# Altium PCB Controller.PcbDoc
Units mm, origin at the board's own origin, x right, y up, seen from the top; angles counter-clockwise.
Board outline 99.31 x 94.49 mm, 2 copper layers (Top Layer, Bottom Layer); 8 components, 17 nets, 92 pads, 45 vias.
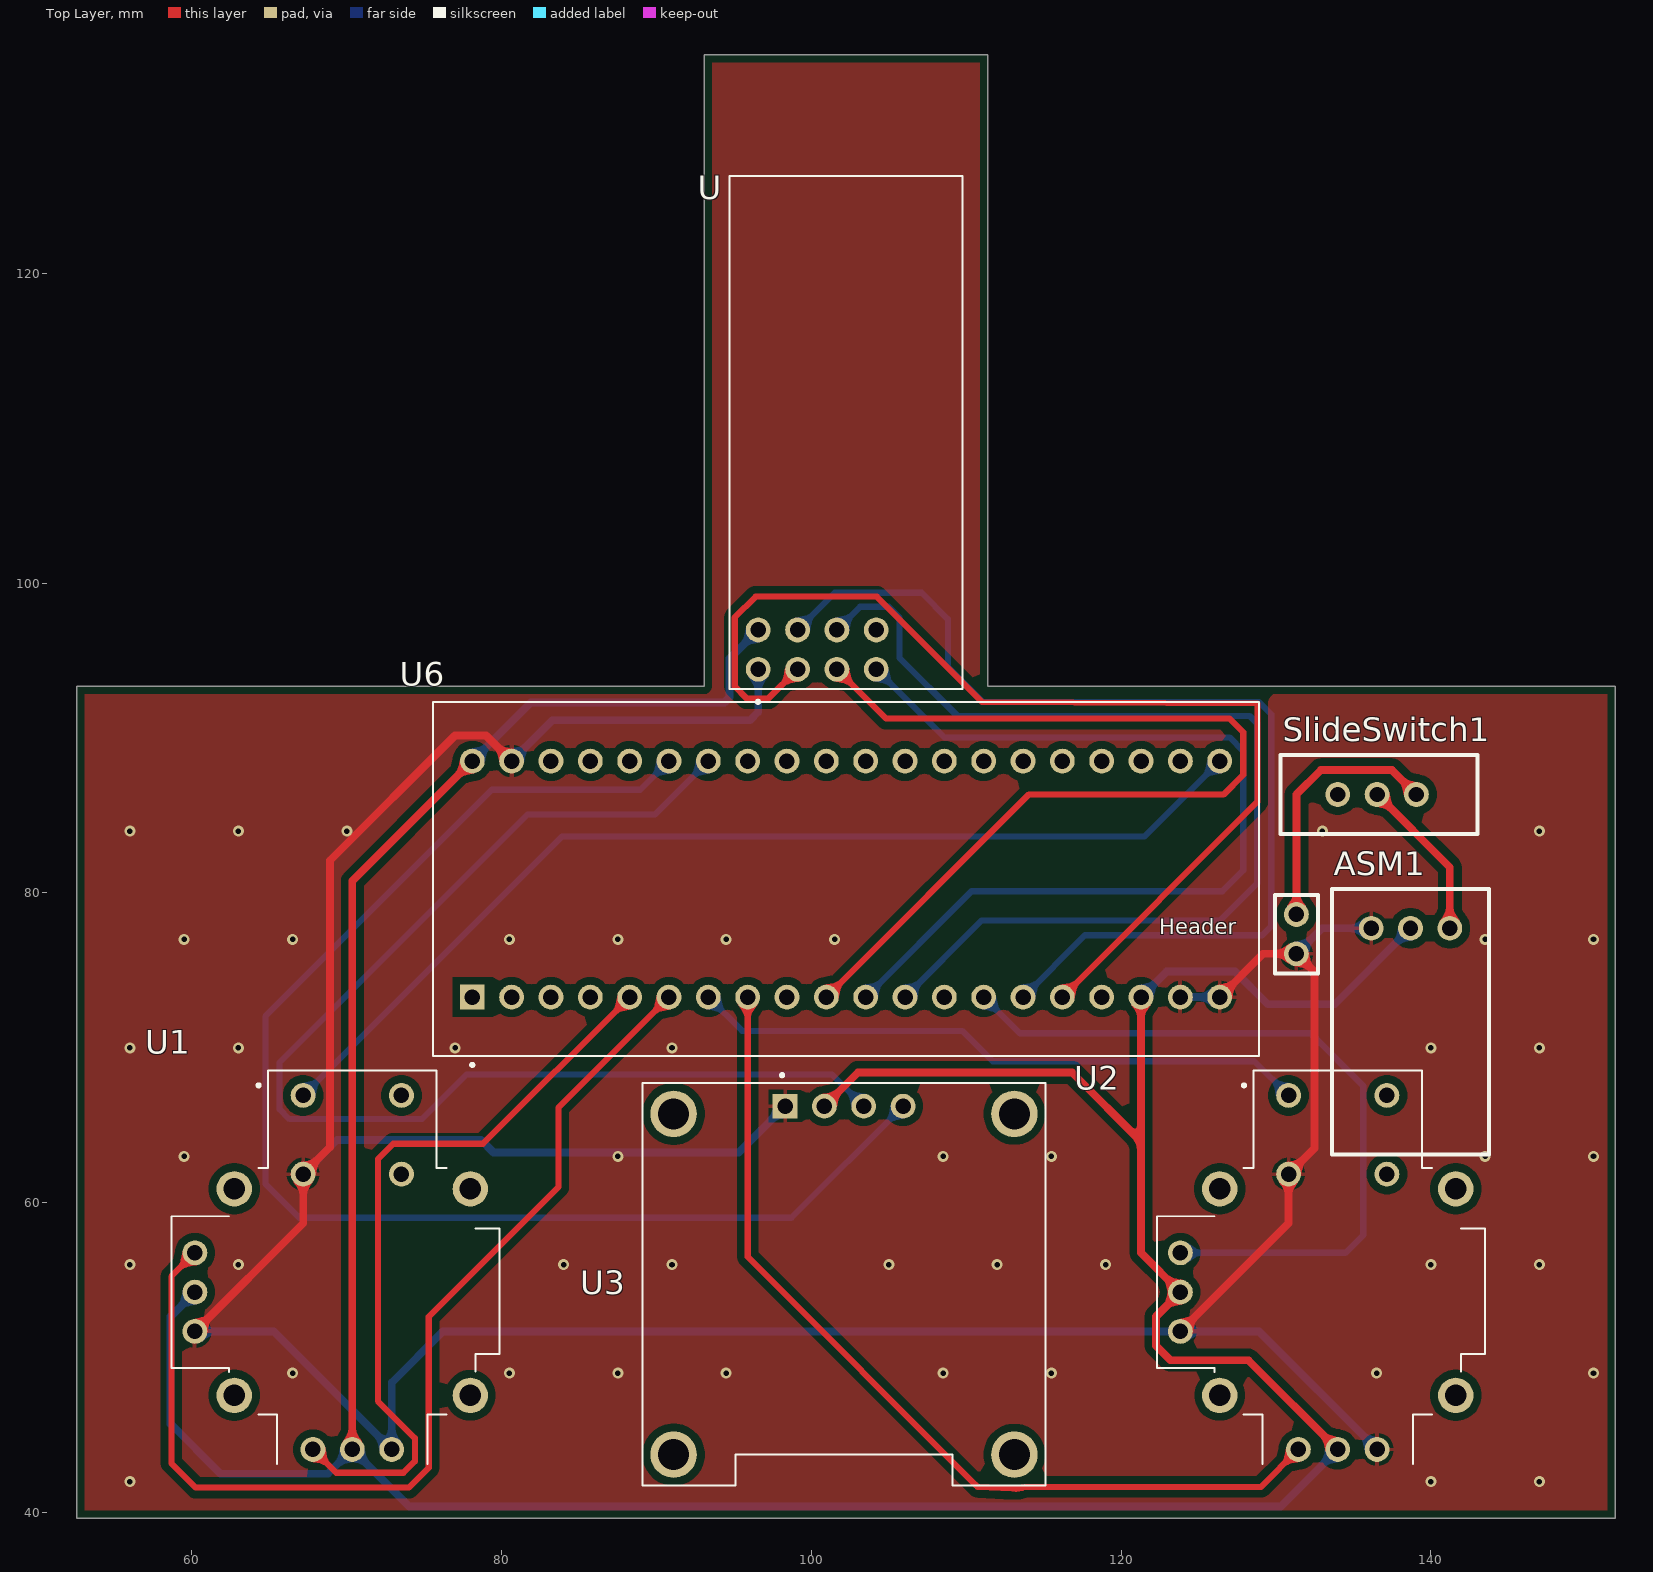
[diagram p0: Top Layer view]
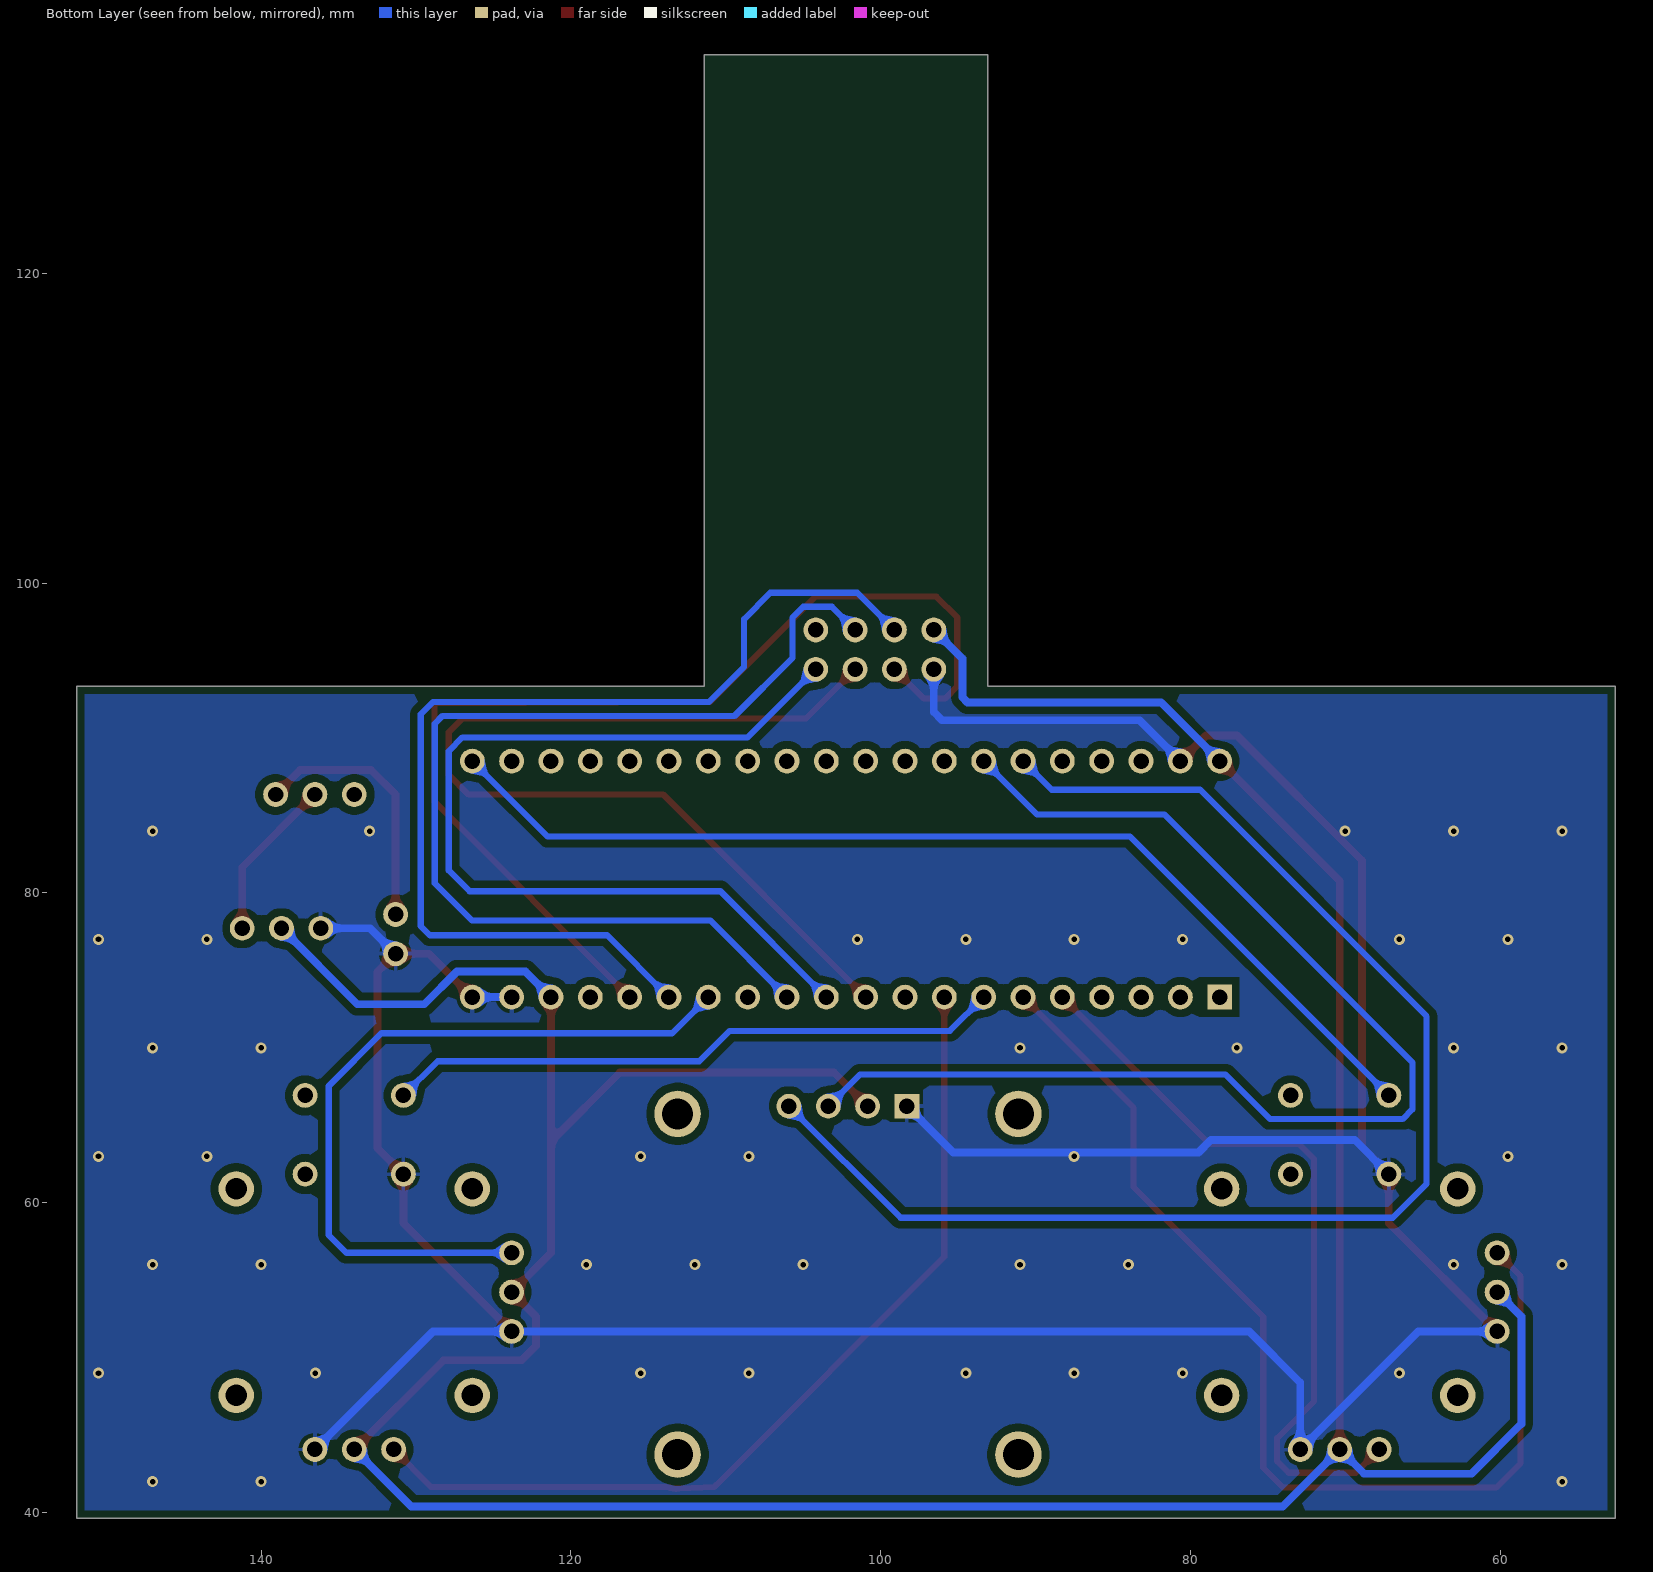
[diagram p1: Bottom Layer view, seen from below]

## Layer stack, top to bottom
Top Solder: solder mask 0.0102, Solder Resist, Dk 3.5
Top Layer: signal copper 0.0356
Dielectric 1: dielectric 0.32, FR-4, Dk 4.8
Bottom Layer: signal copper 0.0356
Bottom Solder: solder mask 0.0102, Solder Resist, Dk 3.5

## Board outline
93.091,93.345 93.091,134.112 111.379,134.112 111.379,93.345 151.892,93.345 151.892,39.624 52.578,39.624 52.578,93.345

## Design rules (kind name [scope] priority, off if disabled: settings)
BoardOutlineClearance [IsPolygon] p1: gap=0.5 ignorepadtopadclearanceinfootprint=FALSE
Clearance [All] p1: gap=0.5 ignorepadtopadclearanceinfootprint=FALSE
PolygonConnect [All] p1: connectstyle=Relief reliefconductorwidth=0.254 reliefentries=4 polygonreliefangle="90 Angle" airgapwidth=0.254
RoutingVias [All] p1: holewidth=0.711 width=1.27 viastyle="Through Hole" minholewidth=0.711 minwidth=1.27 maxholewidth=0.711 maxwidth=1.27
SolderMaskExpansion [All] p1: expansion=0.102 istentingtop=FALSE
SupplyNets "Schematic Supply Nets_2" [InNet('GND')] p1: voltage=0.000
SupplyNets "Schematic Supply Nets_1" [InNet('+3.3V')] p2: voltage=0.000
Width Width_Power [InNet('+3.3V') or  InNet('GND')  or  InNet('NetASM1_0') or  InNet('NetHeader_2')] p1: maxlimit=0.5 minlimit=0.5 preferedwidth=0.5
Width [All] p2: maxlimit=0.4 minlimit=0.4 preferedwidth=0.4
30 further rules are at their usual default settings.

## Components (designator, comment, footprint, x,y, rotation, side; value= is the part's Value field where it differs from the comment)
ASM1 "ASM1117-3.3" PCBComponent_1#1 138.684,77.724 r270 top
Header "Header" 1X2P 131.445,79.375 r180 top
SlideSwitch1 "SlideSwitch" PCBComponent_1#2 132.842,86.36 r270 top
U "NRF24L01P-MODULE-PCB" XCVR_NRF24L01P-MODULE-PCB 102.235,109.728 r90 top
U1 "COM-09032" XDCR_COM-09032 70.358,54.229 r0 top
U2 "COM-09032" XDCR_COM-09032 133.985,54.229 r0 top
U3 "DM-OLED096-636" MODULE_DM-OLED096-636 102.108,54.737 r0 top
U6 "STM32103C8T6" MODULE_ZC323000 102.235,80.899 r90 top

## Footprints (in the part's own frame and the unit in brackets; to place one, negate y for a bottom-side part, rotate by r counter-clockwise, add the part's x,y. Pads: shape width x height; smd on the part's side, far side on the other; paste and mask are expansions set on the pad)
1X2P [mm]
  round 1.6 hole 1: 1(0.127,3.302) 2(0.127,0.762)
  silkscreen extent -1.27,-0.51 1.52,4.57
MODULE_DM-OLED096-636 [mm]
  rect 1.6x1.6 hole 1: 1(-3.81,11.5)
  round 1.6 hole 1: 2(-1.27,11.5) 3(1.27,11.5) 4(3.81,11.5)
  round 3 hole 2: S1(-11,11) S2(11,11) S3(11,-11) S4(-11,-11)
  silkscreen extent -13,-13 13,13.6, body extent -13,-13 13,13, height 5.66
MODULE_ZC323000 [mm]
  rect 1.6x1.6 hole 1: 1(-7.62,24.13)
  round 1.6 hole 1: 2(-7.62,21.59) 3(-7.62,19.05) 4(-7.62,16.51) 5(-7.62,13.97) 6(-7.62,11.43) 7(-7.62,8.89) 8(-7.62,6.35) 9(-7.62,3.81) 10(-7.62,1.27) 11(-7.62,-1.27) 12(-7.62,-3.81) 13(-7.62,-6.35) 14(-7.62,-8.89) 15(-7.62,-11.43) 16(-7.62,-13.97) 17(-7.62,-16.51) 18(-7.62,-19.05) 19(-7.62,-21.59) 20(-7.62,-24.13) 21(7.62,-24.13) 22(7.62,-21.59) 23(7.62,-19.05) 24(7.62,-16.51) 25(7.62,-13.97) 26(7.62,-11.43) 27(7.62,-8.89) 28(7.62,-6.35) 29(7.62,-3.81) 30(7.62,-1.27) 31(7.62,1.27) 32(7.62,3.81) 33(7.62,6.35) 34(7.62,8.89) 35(7.62,11.43) 36(7.62,13.97) 37(7.62,16.51) 38(7.62,19.05) 39(7.62,21.59) 40(7.62,24.13)
  silkscreen extent -12.1,-26.67 11.43,26.67, body extent -10.39,-25.46 10.39,27.08, height 3.46
PCBComponent_1#1 [mm]
  round 1.6 hole 1: 0(0,2.54) 1(0,0) 2(0,-2.54)
  silkscreen extent -2.54,-5.08 14.6,5.08
PCBComponent_1#2 [mm]
  round 1.6 hole 1: 0(0,6.223) 1(0,3.683) 2(0,1.143)
  silkscreen extent -2.54,-2.54 2.54,10.16
XCVR_NRF24L01P-MODULE-PCB [mm]
  round 1.6 hole 1: 1(-15.284,5.669) 2(-12.745,5.669) 3(-15.284,3.129) 4(-12.745,3.129) 5(-15.284,0.589) 6(-12.745,0.589) 7(-15.284,-1.951) 8(-12.745,-1.951)
  silkscreen extent -17.48,-7.53 16.55,7.53
XDCR_COM-09032 [mm]
  round 1.6 hole 1: B1A(-3.175,12.7) B1B(3.175,12.7) B2A(-3.175,7.62) B2B(3.175,7.62) H1(-2.54,-10.16) H2(0,-10.16) H3(2.54,-10.16) V1(-10.16,2.54) V2(-10.16,0) V3(-10.16,-2.54)
  round 2.286 hole 1.397: S1(-7.62,6.667) S2(-7.62,-6.667) S3(7.62,-6.667) S4(7.62,6.667)
  silkscreen extent -11.68,-11.1 9.5,14.3

## Part data
Header: library part Component_1
U: "- Transceiver For Use With nRF24L01+", Package=None, Availability=Bad, MF="Nordic Semiconductor", Mouser-Purchase-URL=https://snapeda.com/shop?store=Mouser&id=230534, MP=NRF24L01P-MODULE-PCB, Price=None, SnapEDA_Link=https://www.snapeda.com/parts/NRF24L01P-MODULE-PCB/Nordic%20Semiconductor%20ASA/view-part/230534/?ref=snap
U1 U2: "Thumb Joystick", Package=None, Availability=Unavailable, MP=COM-09032, Price=None
U3: "0.96â€ 128 X 64 MONOCHROME GRAPHIC OLED DISPLAY MODULE - I2C", Package=Package, Check_prices=https://www.snapeda.com/parts/DM-OLED096-636/Display+Module/view-part/?ref=eda, MF="Display Module", MP=DM-OLED096-636, SnapEDA_Link=https://www.snapeda.com/parts/DM-OLED096-636/Display+Module/view-part/?ref=snap
U6: Package=None, Availability=Unavailable, MP=ZC323000, Price=None

## Via types
v1: diameter 0.711, hole 0.356, Top Layer to Bottom Layer, 45 vias

## Nets (pads, with @x,y where several pads share a name; then routed paths per layer and width w, separated by ;. In a path a pad name is that pad's centre, name@x,y a point inside that pad or via, vN(x,y) a via of type N, cw(c..) or ccw(c..) an arc to the next point about the centre after c; other vN are vias at no path point)
+3.3V: ASM1.1 U1.H2 U1.V2 U2.H2 U2.V2 U3.2 U6.18 U6.40 U.2 | length 243.5
  Top Layer w0.5: U1.H2 70.358,80.772 U6.40 ; U3.2 103.003,68.402 116.84,68.402 121.285,63.957 ; U6.18 121.285,63.957 ; U2.H2 128.219,49.835 123.19,49.835 122.25,50.775 122.25,52.654 U2.V2 121.285,56.769 121.285,63.957
  Bottom Layer w0.5: U1.V2 58.623,52.654 58.623,45.72 61.849,42.494 68.783,42.494 U1.H2 74.041,40.386 130.302,40.386 U2.H2 ; U6.40 81.89,92.304 94.386,92.304 94.717,92.634 94.717,95.134 U.2 ; U6.18 122.936,74.93 127.356,74.93 129.464,72.822 133.782,72.822 ASM1.1
GND: ASM1.2 Header.1 U1.B2A U1.H3 U1.V3 U2.B2A U2.H3 U2.V3 U3.1 U6.19 U6.20 U6.39 U.1 | length 234.3
  Top Layer w0.5: U1.V3 67.183,58.674 U1.B2A 68.91,63.576 68.91,82.093 76.987,90.17 78.994,90.17 U6.39 ; U2.V3 130.81,58.674 U2.B2A 132.486,63.525 132.486,74.905 Header.1 129.159,76.073 U6.20
  Bottom Layer w0.5: U1.V3 65.278,51.689 U1.H3 72.898,48.387 76.2,51.689 U2.V3 128.905,51.689 U2.H3 ; U1.B2A 69.393,64.059 78.664,64.059 79.477,63.246 95.307,63.246 U3.1 ; U6.39 83.287,91.161 96.033,91.161 96.566,91.694 U.1 ; U6.19 U6.20 ; Header.1 132.969,77.724 ASM1.2
  other v1: 56,42 140,42 147,42 66.5,49 80.5,49 87.5,49 94.5,49 108.5,49 115.5,49 136.5,49 150.5,49 56,56 63,56 84,56 91,56 105,56 112,56 119,56 140,56 147,56 59.5,63 87.5,63 108.5,63 115.5,63 143.5,63 150.5,63 56,70 63,70 77,70 91,70 140,70 147,70 59.5,77 66.5,77 80.5,77 87.5,77 94.5,77 101.5,77 143.5,77 150.5,77 56,84 63,84 70,84 133,84 147,84
Joy1: U1.V1 U6.6 | length 68.8
  Top Layer w0.4: U1.V1 58.674,55.245 58.674,43.18 60.249,41.605 74.013,41.605 75.298,42.89 75.298,52.641 83.668,61.011 83.668,66.142 U6.6
Joy2: U1.H1 U6.5 | length 48.6
  Top Layer w0.4: U1.H1 69.318,42.569 73.66,42.569 74.398,43.307 74.398,44.804 72.009,47.193 72.009,62.814 73,63.805 78.791,63.805 U6.5
Joy3: U2.V1 U6.14 | length 48.8
  Bottom Layer w0.4: U6.14 113.462,70.942 132.232,70.942 135.636,67.539 135.636,57.912 134.493,56.769 U2.V1
Joy4: U2.H1 U6.8 | length 59.5
  Top Layer w0.4: U6.8 95.885,56.515 110.627,41.773 110.744,41.656 112.995,41.54 ccw(c113.108,43.737) 113.822,41.656 129.032,41.656 U2.H1
"Joy Button1": U1.B1A U6.21 | length 68.1
  Bottom Layer w0.4: U1.B1A 83.896,83.642 121.488,83.642 U6.21
"Joy Button2": U2.B1A U6.7 | length 40.1
  Bottom Layer w0.4: U6.7 95.529,71.095 109.753,71.095 111.709,69.139 128.6,69.139 U2.B1A
NetASM1_0: ASM1.0 SlideSwitch1.1 | length 10.6
  Top Layer w0.5: SlideSwitch1.1 141.224,81.661 ASM1.0
NetHeader_2: Header.2 SlideSwitch1.0 | length 16.8
  Top Layer w0.5: Header.2 131.318,86.36 132.893,87.935 137.49,87.935 SlideSwitch1.0
"NRF CE": U6.16 U.3 | length 70.9
  Top Layer w0.4: U.3 97.22,92.558 95.834,92.558 95.047,93.345 95.047,97.79 96.393,99.136 104.216,99.136 111.023,92.329 128.803,92.227 128.803,85.877 U6.16
"NRF CSN": U6.15 U.4 | length 68.2
  Bottom Layer w0.4: U.4 101.506,99.384 107.121,99.384 108.815,97.69 108.815,94.614 111.1,92.329 128.905,92.329 129.689,91.545 129.689,77.867 129.1,77.278 117.664,77.278 U6.15
SCL: U3.3 U6.34 | length 78.8
  Bottom Layer w0.4: U6.34 89.891,85.065 81.661,85.065 65.659,69.063 65.659,66.04 66.294,65.405 74.854,65.405 77.724,68.275 101.34,68.275 U3.3
SDA: U3.4 U6.35 | length 88.8
  Bottom Layer w0.4: U6.35 88.951,86.665 79.375,86.665 64.745,72.034 64.745,61.214 66.929,59.03 98.711,59.03 U3.4
"SPI1 MISO": U6.11 U.7 | length 61.4
  Bottom Layer w0.4: U6.11 110.338,80.112 126.543,80.112 127.889,81.458 127.889,89.154 127,90.043 108.587,90.043 U.7
"SPI1 MOSI": U6.12 U.6 | length 68.5
  Bottom Layer w0.4: U.6 103.146,98.484 104.993,98.484 105.686,97.79 105.686,95.177 109.434,91.429 128.292,91.429 128.789,90.932 128.789,80.631 126.39,78.232 110.998,78.232 U6.12
"SPI1 SCK": U6.10 U.5 | length 63.5
  Top Layer w0.4: U6.10 114.046,86.36 126.619,86.36 127.889,87.63 127.889,90.373 127,91.262 104.828,91.262 U.5
pads on no net: SlideSwitch1.2 U1.B1B U1.B2B U1.S1 U1.S2 U1.S3 U1.S4 U2.B1B U2.B2B U2.S1 U2.S2 U2.S3 U2.S4 U3.S1 U3.S2 U3.S3 U3.S4 U6.1 U6.2 U6.3 U6.4 U6.9 U6.13 U6.17 U6.22 U6.23 U6.24 U6.25 U6.26 U6.27 U6.28 U6.29 U6.30 U6.31 U6.32 U6.33 U6.36 U6.37 U6.38 U.8

## Polygon pours and split planes (outlines as drawn)
GND on Top Layer "GND_L01_P000" (solid, remove dead copper, pour order 0): 52.578,93.345 93.091,93.345 93.091,134.112 111.379,134.112 111.379,93.345 151.892,93.345 151.892,39.624 52.578,39.624
GND on Bottom Layer "GND_L02_P001" (solid, remove dead copper, pour order 1): 52.578,39.624 52.578,93.345 93.091,93.345 93.091,134.112 111.379,134.112 111.379,93.345 151.892,93.345 151.892,39.624